# Altium PCB Version2.4.PcbDoc
Units mm, origin at the board's own origin, x right, y up, seen from the top; angles counter-clockwise.
Board outline 27.94 x 47.63 mm, 2 copper layers (Top Layer, Bottom Layer); 2 components, 16 nets, 38 pads, 2 vias.
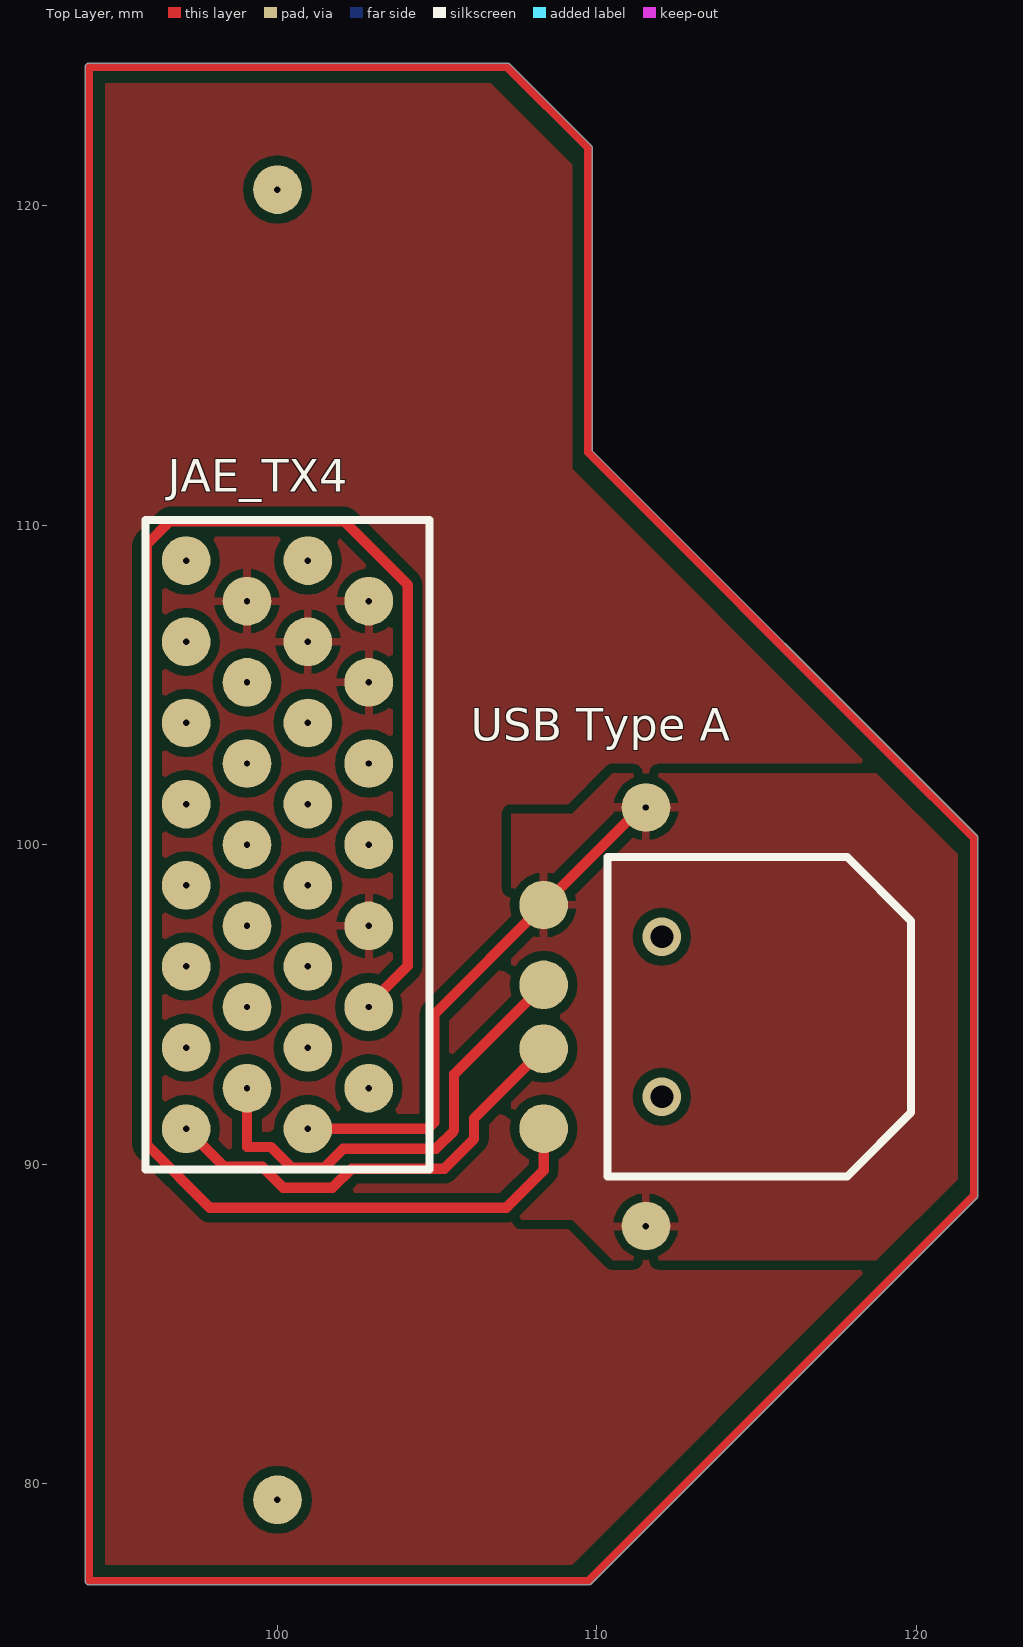
[diagram p0: Top Layer view]
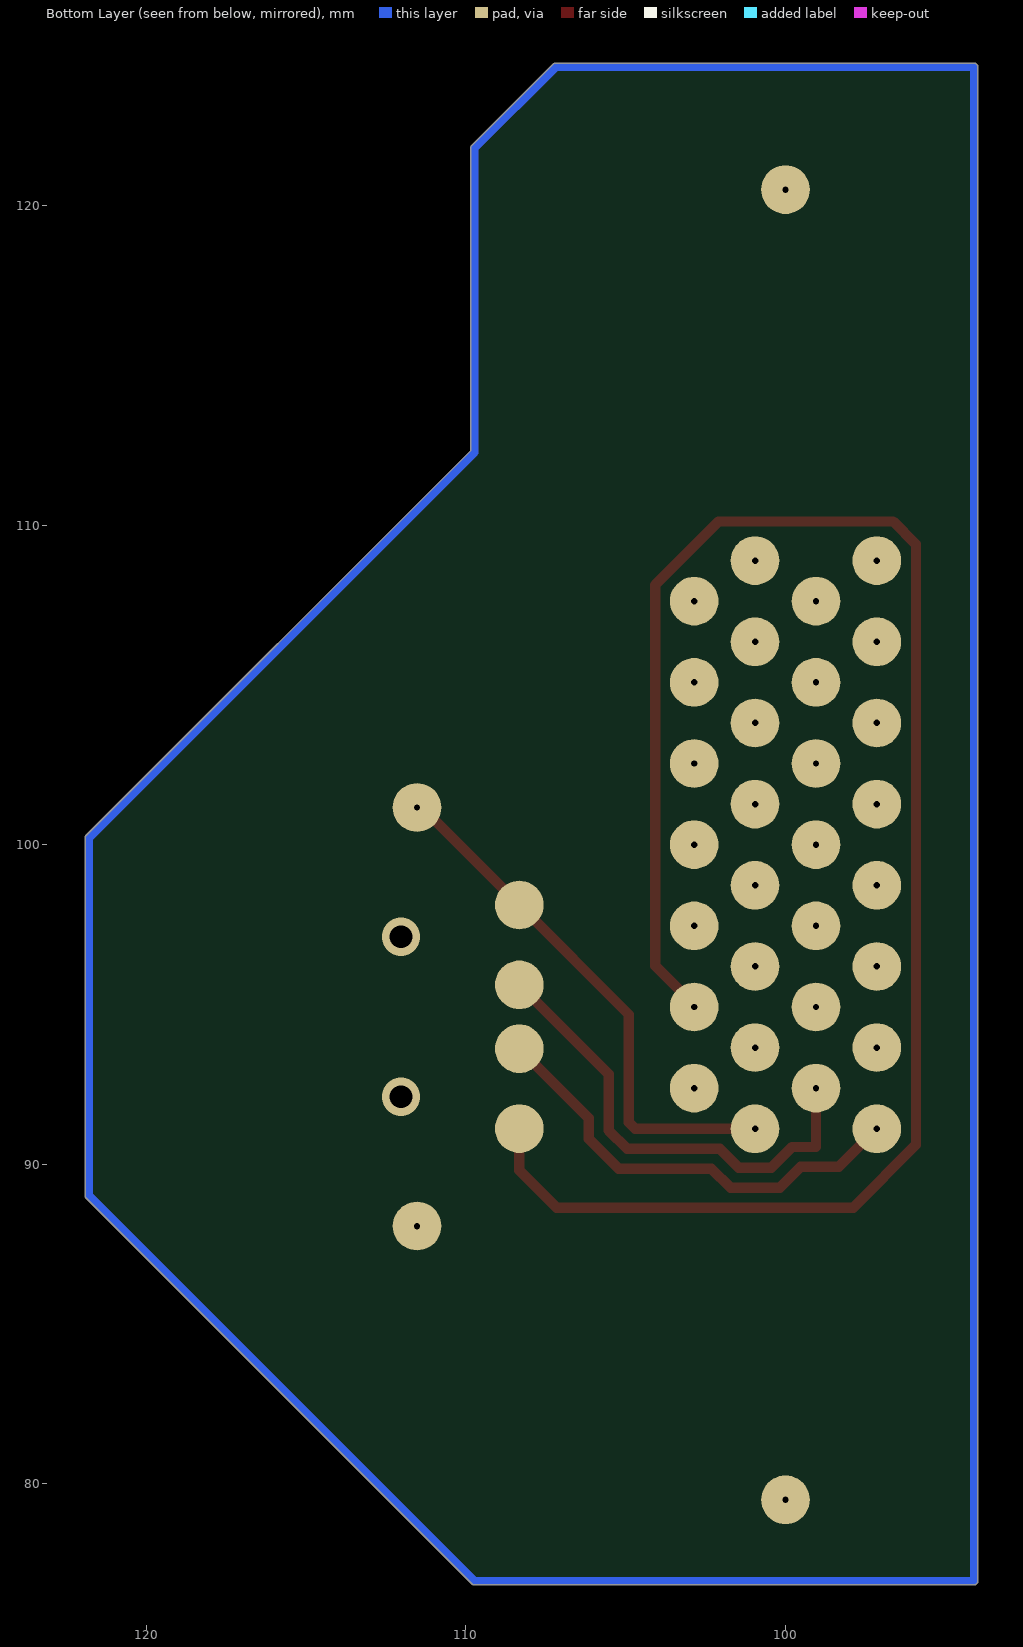
[diagram p1: Bottom Layer view, seen from below]

## Layer stack, top to bottom
Top Solder: solder mask 0.0102, Solder Resist, Dk 3.5
Top Layer: signal copper 0.0356
Dielectric 1: dielectric 0.32, FR-4, Dk 4.8
Bottom Layer: signal copper 0.0356
Bottom Solder: solder mask 0.0102, Solder Resist, Dk 3.5

## Board outline
93.98,76.962 ccw(c94.107,76.962) 94.107,76.835 109.728,76.835 ccw(c109.728,76.962) 109.819,76.872 109.818,76.872 121.883,88.937 121.883,88.936 ccw(c121.793,89.027) 121.92,89.027 121.92,100.203 ccw(c121.793,100.203) 121.883,100.294 121.883,100.293 109.855,112.321 109.855,121.793 ccw(c109.728,121.793) 109.818,121.884 109.818,121.883 107.278,124.423 107.279,124.423 ccw(c107.188,124.333) 107.188,124.46 94.107,124.46 ccw(c94.107,124.333) 93.98,124.333

## Design rules (kind name [scope] priority, off if disabled: settings)
Clearance [All] p1: gap=0.3
DiffPairsRouting [All] p1: maxlimit=0.35 minlimit=0.3 mostfreqgap=0.3 toplayer_minwidth=0.3 toplayer_maxwidth=0.35 toplayer_prefwidth=0.325 bottomlayer_minwidth=0.3 bottomlayer_maxwidth=0.35 bottomlayer_prefwidth=0.325 maxuncoupledlength=12.7
PolygonConnect [All] p1: connectstyle=Relief reliefconductorwidth=0.254 reliefentries=4 polygonreliefangle="90 Angle" airgapwidth=0.254
RoutingVias [All] p1: holewidth=0.711 width=1.27 viastyle="Through Hole" minholewidth=0.711 minwidth=1.27 maxholewidth=0.711 maxwidth=1.27
SolderMaskExpansion [All] p1: expansion=0.102
Width [All] p1: maxlimit=0.5 minlimit=0.3 preferedwidth=0.325
29 further rules are at their usual default settings.

## Classes and differential pairs
differential pair NewDifferentialPair1: +D_P -D_N

## Components (designator, comment, footprint, x,y, rotation, side; value= is the part's Value field where it differs from the comment)
JAE_TX4 "30 pin" TX_24 100,100 r0 top
"USB Type A" "Host" "USB 2.0 SMD" 108.331,94.615 r90 top

## Footprints (in the part's own frame and the unit in brackets; to place one, negate y for a bottom-side part, rotate by r counter-clockwise, add the part's x,y. Pads: shape width x height; smd on the part's side, far side on the other; paste and mask are expansions set on the pad)
TX_24 [mil]
  round 60 hole 7.87: 1(-112.5,-350) 2(-37.5,-300) 3(-112.5,-250) 4(-37.5,-200) 5(-112.5,-150) 6(-37.5,-100) 7(-112.5,-50) 8(-37.5,0) 9(-112.5,50) 10(-37.5,100) 11(-112.5,150) 12(-37.5,200) 13(-112.5,250) 14(-37.5,300) 15(-112.5,350) 16(37.5,-350) 17(112.5,-300) 18(37.5,-250) 19(112.5,-200) 20(37.5,-150) 21(112.5,-100) 22(37.5,-50) 23(112.5,0) 24(37.5,50) 25(112.5,100) 26(37.5,150) 27(112.5,200) 28(37.5,250) 29(112.5,300) 30(37.5,350)
  silkscreen extent -162,-400 187,400
"USB 2.0 SMD" [mil] "Type A"
  round 60 all layers, no hole: 1(-137.8,0) 2(-39.37,0) 3(39.37,0) 4(137.8,0)
  round 60 hole 7.87: 5(-257.87,-125.98) 6(257.87,-125.98)
  silkscreen extent -197,-453 197,-79

## Part data
JAE_TX4: library part JAE_TX4
"USB Type A": library part "USB Type A"

## Free pads (board coordinates)
  round 1.524 hole 0.2: 0(100,120.5) 1(100,79.5)

## Via types
v1: diameter 1.2, hole 0.711, Top Layer to Bottom Layer, 2 vias

## Nets (pads, with @x,y where several pads share a name; then routed paths per layer and width w, separated by ;. In a path a pad name is that pad's centre, name@x,y a point inside that pad or via, vN(x,y) a via of type N, cw(c..) or ccw(c..) an arc to the next point about the centre after c; other vN are vias at no path point)
+5V: JAE_TX4.17
BATT: JAE_TX4.15
"BUS ID": JAE_TX4.23
CANH1: JAE_TX4.12
CANL1: JAE_TX4.13
D_N: "USB Type A.2" JAE_TX4.1 | length 14.6
  Top Layer w0.254: JAE_TX4.1@97.143,90.69 JAE_TX4.1
  Top Layer w0.325: JAE_TX4.1 98.337,89.916 99.531,89.916 100.186,89.26 101.719,89.26 102.318,89.86 105.217,89.86 106.152,90.795 106.152,91.436 108.331,93.615
D_P: "USB Type A.3" JAE_TX4.2 | length 14.8
  Top Layer w0.325: JAE_TX4.2 99.048,90.553 99.06,90.541 99.79,90.541 100.445,89.885 101.46,89.885 102.059,90.485 104.958,90.485 105.527,91.054 105.527,92.811 108.331,95.615
GND: JAE_TX4.14 JAE_TX4.21 JAE_TX4.27 JAE_TX4.28 JAE_TX4.29
SER2CT: JAE_TX4.25
SER2RT: JAE_TX4.10
SER2RX: JAE_TX4.26
SER2TX: JAE_TX4.11
SER5RX: JAE_TX4.24
SER5TX: JAE_TX4.9
USB_5V: "USB Type A.1" JAE_TX4.19 | length 56.8
  Top Layer w0.325: JAE_TX4.19@102.858,94.984 104.082,96.208 104.082,108.127 102.095,110.115 96.635,110.115 95.918,109.397 95.918,90.603 97.885,88.635 107.159,88.635 108.331,89.808 108.331,91.115
USB_GND: "USB Type A.4" "USB Type A.5" "USB Type A.6" JAE_TX4.16 | length 16.6
  Top Layer w0.325: JAE_TX4.16 104.699,91.11 104.902,91.313 104.902,94.686 108.331,98.115 111.381,101.165
pads on no net: JAE_TX4.3 JAE_TX4.4 JAE_TX4.5 JAE_TX4.6 JAE_TX4.7 JAE_TX4.8 JAE_TX4.18 JAE_TX4.20 JAE_TX4.22 JAE_TX4.30
copper on no net:
  other v1: 112.031,92.115 112.031,97.115

## Polygon pours and split planes (outlines as drawn)
GND on Top Layer "Top Layer-No Net" (solid, pour order 2): 94.615,123.825 94.615,77.47 107.95,77.47 109.22,77.47 121.285,89.535 121.285,99.695 118.745,102.235 109.22,111.76 109.22,116.078 109.22,121.285 106.68,123.825 94.615,123.825
USB_GND on Top Layer "Top Layer-No Net" (solid, pour order 0): 107.95,100.965 109.22,100.965 110.49,102.235 118.237,102.235 118.745,102.235 121.285,99.695 121.285,89.535 118.745,86.995 110.49,86.995 109.22,88.265 107.315,88.265 107.315,100.965 107.95,100.965

## Other copper
Multi-Layer:
  lines w0.254: 94.107,76.962 109.728,76.962 121.793,89.027 121.793,100.203 119.253,102.743 109.728,112.268 109.728,121.793 107.188,124.333 94.107,124.333 94.107,123.698 94.107,76.962